# Altium PCB EMG_Sensors_Control.PcbDoc
Units mm, origin at the board's own origin, x right, y up, seen from the top; angles counter-clockwise.
Board outline 30 x 55.02 mm, 2 copper layers (Top Layer, Bottom Layer), stack 1.57 mm thick; 63 components, 52 nets, 270 pads, 73 vias.
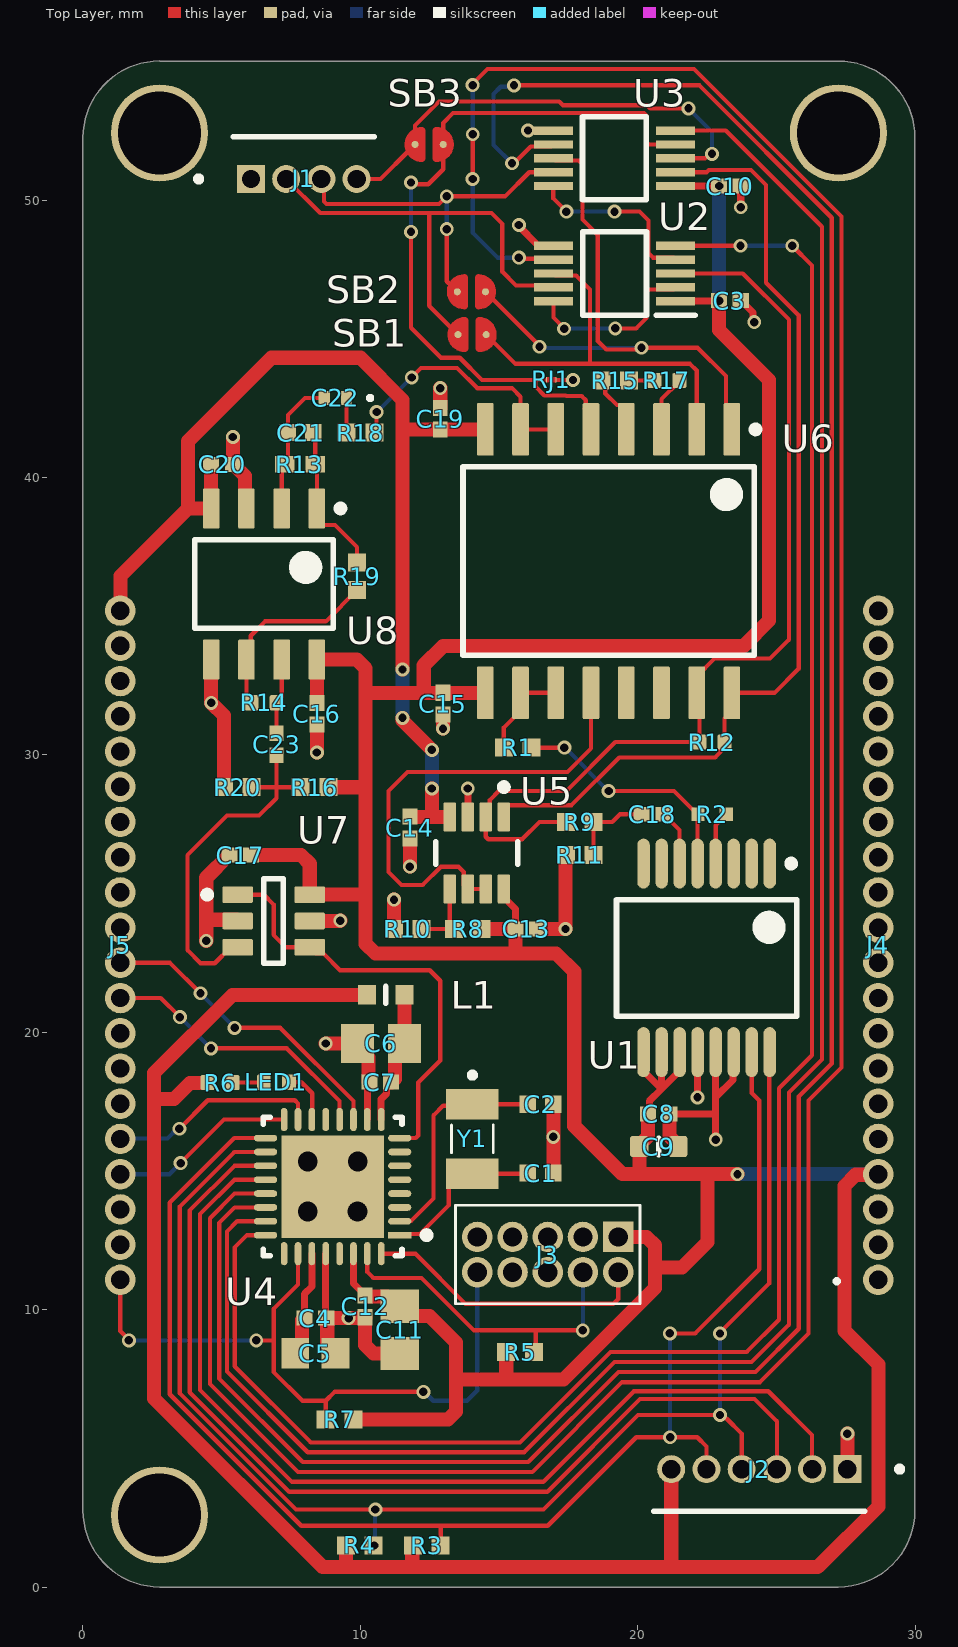
[diagram p0: Top Layer view]
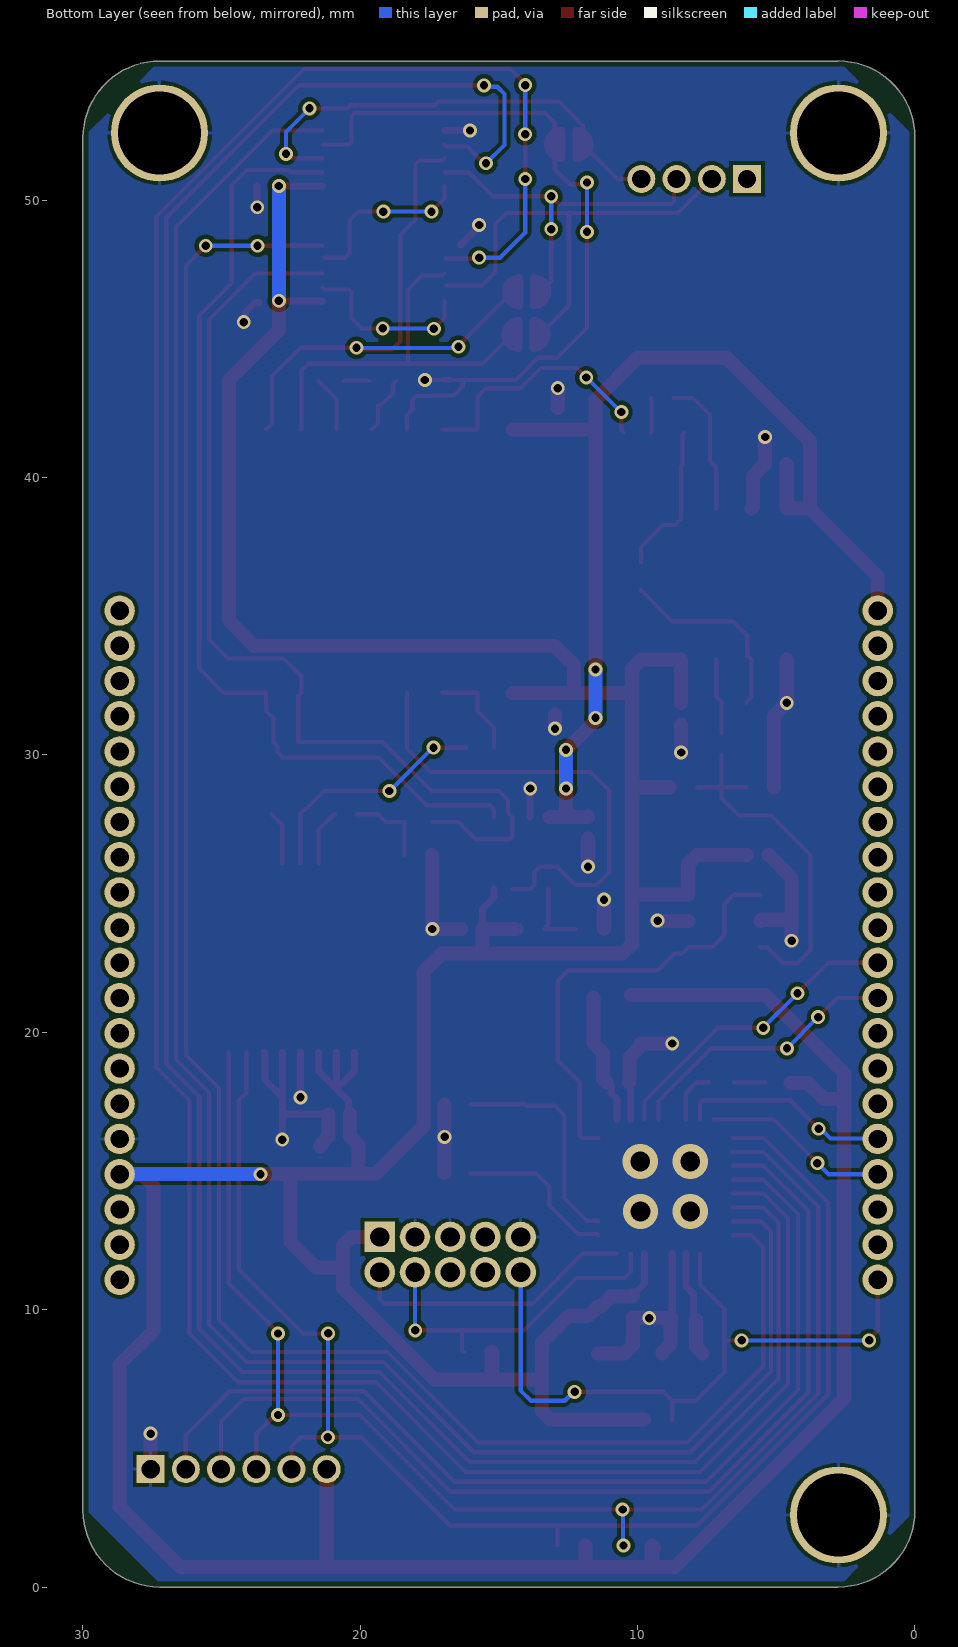
[diagram p1: Bottom Layer view, seen from below]
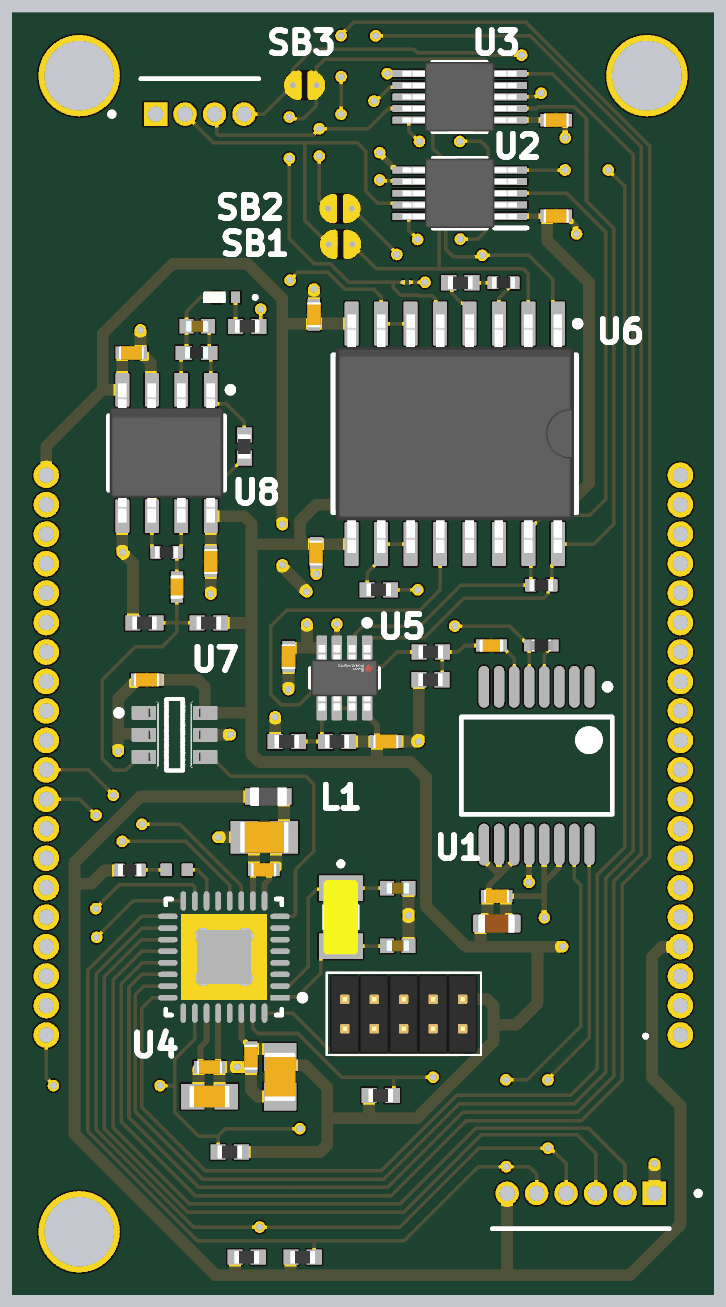
[diagram p2: 3D render of the assembled board from above, using the file's embedded part models]

## Layer stack, top to bottom
Top Solder: solder mask 0.01, Solder Resist, Dk 3.8
Top Layer: signal copper 0.035
Dielectric: core 1.5, FR-4, Dk 4.5
Bottom Layer: signal copper 0.035
Bottom Solder: solder mask 0.01, Solder Resist, Dk 3.8

## Board outline
0,2.762 ccw(c2.762,2.762) 2.762,0 27.235,0 ccw(c27.235,2.762) 29.997,2.762 29.997,52.252 ccw(c27.235,52.252) 27.235,55.015 2.762,55.017 2.762,55.02 ccw(c2.762,52.258) 0,52.258

## Design rules (kind name [scope] priority, off if disabled: settings)
BoardOutlineClearance [All] p1: gap=0.2 ignorepadtopadclearanceinfootprint=FALSE
Clearance [All] p1: gap=0.127 ignorepadtopadclearanceinfootprint=FALSE except(0.2: Arc-SMDPad Arc-THPad Track-SMDPad Track-THPad; 0.25: SMDPad-Hole THPad-Hole Via-Hole Fill-Hole Poly-Hole Region-Hole Text-Hole; 0.254: Arc-Via Track-Via; 0.33: Arc-Hole Track-Hole)
ComponentClearance [All] p1: gap=0.127 collisioncheckmode=3 verticalgap=0.127 showdistances=TRUE
DiffPairsRouting [All] p1: maxlimit=0.254 minlimit=0.127 mostfreqgap=0.127 toplayer_minwidth=0.127 toplayer_maxwidth=25.4 toplayer_prefwidth=0.127 bottomlayer_minwidth=0.127 bottomlayer_maxwidth=25.4 bottomlayer_prefwidth=0.127 maxuncoupledlength=12.7
Height [All] p1: minheight=0 maxheight=1816.048 prefheight=12.7
HoleSize [All] p1: absolutevalues=TRUE maxlimit=6.3 minlimit=0.3 maxpercent=80.000 minpercent=20.000
HoleToHoleClearance [All] p1: gap=0.25 allowstackedmicrovias=FALSE
MinimumAnnularRing [All] p1: minimumring=0.076
MinimumSolderMaskSliver [All] p1: minsoldermaskwidth=0
PlaneClearance [All] p1: clearance=0.127
PlaneConnect PlaneConnectPowerPads [InPadClass('PowerPads')] p1: planeconnectstyle=Direct reliefexpansion=0.508 reliefentries=4 reliefconductorwidth=0.254 reliefairgap=0.254
PlaneConnect [All] p2: pad.planeconnectstyle=Relief pad.reliefexpansion=0.3 pad.reliefentries=4 pad.reliefconductorwidth=0.127 pad.reliefairgap=0.127 via.planeconnectstyle=Direct via.reliefexpansion=0.3 via.reliefentries=4 via.reliefconductorwidth=0.127 via.reliefairgap=0.127
PolygonConnect PolygonConnectPowerPads [All vs (InPadClass('PowerPads'))] p1: connectstyle=Direct reliefconductorwidth=0.254 reliefentries=4 polygonreliefangle="90 Angle" airgapwidth=0.254
PolygonConnect [All] p2: thpad.connectstyle=Relief thpad.reliefconductorwidth=0.127 thpad.reliefentries=4 thpad.polygonreliefangle="90 Angle" thpad.airgapwidth=0.127 smdpad.connectstyle=Relief smdpad.reliefconductorwidth=0.127 smdpad.reliefentries=4 smdpad.polygonreliefangle="90 Angle" smdpad.airgapwidth=0.127 via.connectstyle=Direct via.reliefconductorwidth=0.127 via.reliefentries=4 via.polygonreliefangle="90 Angle" via.airgapwidth=0.127
RoutingVias [All] p1: holewidth=0.3 width=0.5 viastyle="Through Hole" minholewidth=0.3 minwidth=0.5 maxholewidth=1.5 maxwidth=6.6
SilkToSilkClearance [All] p1: silktosilkclearance=0
SilkToSolderMaskClearance [IsPad] p1: minsilkscreentomaskgap=0.127 clearancetoexposedcopper=TRUE
SolderMaskExpansion [All] p1: expansion=0.075 istentingtop=FALSE
Width [All] p1: maxlimit=0.508 minlimit=0.152 preferedwidth=0.254 minimp=50.000000 maximp=50.000000 favimp=50.000000
20 further rules are at their usual default settings.

## Components (designator, comment, footprint, x,y, rotation, side; value= is the part's Value field where it differs from the comment)
C1 "15 pF" CAPC1005X55N 16.497,14.925 r180 top
C2 "15 pF" CAPC1005X55N 16.497,17.404 r180 top
C3 "Capacitor 0.1 uF +/- 5% 16 V 0402" CAPC1005X56X25LL10T15 23.325,46.378 r0 top value=0.1uF
C4 "Capacitor 0.1 uF +/- 5% 16 V 0402" CAPC1005X56X25LL10T15 8.382,9.693 r180 top value=100nF
C5 "Capacitor 1uF +/- 10% 16V 0603" CAPC1608X90X35ML15T15 8.379,8.421 r0 top value=1µF
C6 "Capacitor 10 uF +/- 10% 16 V 0805" CAPC2013X135X45NL10T25 10.746,19.597 r0 top value=10µF
C7 "Capacitor 0.1 uF +/- 5% 16 V 0402" CAPC1005X56X25LL10T15 10.72,18.2 r0 top value=100nF
C8 "Capacitor 0.1 uF +/- 5% 16 V 0402" CAPC1005X56X25LL10T15 20.758,17.055 r0 top value=0.1uF
C9 "Capacitor 10µF +/-20% 10V 0603" CAPC0603(1608)100_L 20.758,15.88 r0 top value=10µF
C10 "Capacitor 0.1 uF +/- 5% 16 V 0402" CAPC1005X56X25LL10T15 23.325,50.51 r0 top value=0.1uF
C11 "Capacitor 10 uF +/- 10% 16 V 0805" CAPC2013X135X45NL10T25 11.419,9.271 r90 top value=10µF
C12 "Capacitor 0.1 uF +/- 5% 16 V 0402" CAPC1005X56X25LL10T15 10.17,10.117 r90 top value=100nF
C13 "Capacitor 0.1 uF +/- 5% 16 V 0402" CAPC1005X56X25LL10T15 15.982,23.726 r180 top value=0.1uF
C14 "Capacitor 0.1 uF +/- 5% 16 V 0402" CAPC1005X56X25LL10T15 11.787,27.384 r270 top value=0.1uF
C15 "Capacitor 0.1 uF +/- 5% 16 V 0402" CAPC1005X56X25LL10T15 12.979,31.852 r90 top value=0.1uF
C16 "Capacitor 0.1 uF +/- 5% 16 V 0402" CAPC1005X56X25LL10T15 8.433,31.488 r90 top value=0.1uF
C17 "Capacitor 0.1 uF +/- 5% 16 V 0402" CAPC1005X56X25LL10T15 5.672,26.387 r0 top value=0.1uF
C18 "Capacitor 1 uF +/- 10% 6.3 V 0402" CAPC1005X55X25LL05T10 20.528,27.864 r180 top value=1µF
C19 "Capacitor 0.1 uF +/- 5% 16 V 0402" CAPC1005X56X25LL10T15 12.881,42.119 r90 top value=0.1uF
C20 "Capacitor 0.1 uF +/- 5% 16 V 0402" CAPC1005X56X25LL10T15 5.013,40.48 r0 top value=0.1uF
C21 "22 nF" CAPC1005X55N 7.849,41.623 r0 top
C22 "3.3µF" C1005_Commercial 9.1,42.87 r180 top
C23 "Capacitor 1 uF +/- 10% 6.3 V 0402" CAPC1005X55X25LL05T10 6.978,30.387 r270 top value=1µF
J1 "TMS-104-02-L-S-RA" SAMTEC_TMS-104-02-L-S-RA 7.961,50.767 r0 top
J2 "TMS-106-02-G-S-RA" SAMTEC_TMS-106-02-G-S-RA 24.384,4.25 r180 top
J3 "M50-3500542" M503500542 19.297,12.62 r180 top
J4 "TMS-120-02-G-S" TMS-120-YY-XX-S 28.677,11.074 r90 top locked
J5 "TMS-120-02-G-S" TMS-120-YY-XX-S 1.346,11.074 r90 top locked
L1 "BLM18PG471SN1B" BLM18AG102BH1D 10.919,21.351 r0 top
LED1 "QBLP595-IG" QTB-QBLP595_V 6.971,18.2 r180 top
R1 "Resistor 10k +/-1% 0402 63 mW" RESC1005X40X25ML05T05 15.674,30.263 r0 top value=10k
R2 "ERJ-H2RD1502X" H2C/H2R 22.682,27.864 r0 top
R3 "Resistor 4k7 +/-1% 0402 100 mW" RESC1005X40X25ML05T05 12.395,1.499 r180 top value=4.7k
R4 "Resistor 4k7 +/-1% 0402 100 mW" RESC1005X40X25ML05T05 9.982,1.499 r180 top value=4.7k
R5 "Resistor 1k +/-1% 0402 63 mW" RESC1005X40X25ML05T05 15.759,8.471 r0 top value=1k
R6 "Resistor 330R +/-5 % 0402 63 mW" RESC0402(1005)_L 4.943,18.187 r0 top value=330
R7 "Resistor 10k +/-1% 0402 63 mW" RESC1005X40X25ML05T05 9.252,6.033 r180 top value=10k
R8 "Resistor 100k +/-1% 0402 63 mW" RESC1005X40X25ML05T05 13.874,23.726 r180 top value=100k
R9 "Resistor 100k +/-1% 0402 63 mW" RESC1005X40X25ML05T05 17.915,27.584 r180 top value=100k
R10 "Resistor 100k +/-1% 0402 63 mW" RESC1005X40X25ML05T05 11.711,23.726 r180 top value=100k
R11 "Resistor 1k +/-1% 0402 63 mW" RESC1005X40X25ML05T05 17.907,26.387 r180 top value=1k
R12 "Resistor 1M +/-1 % 0402 63 mW" RESC0402(1005)_L 22.682,30.463 r0 top value=1M
R13 "30k" RESC1005X40N 7.823,40.48 r0 top
R14 "Resistor 47K5 +/-1 % 0402 63 mW" RESC0402(1005)_L 6.528,31.878 r0 top value=47.5k
R15 "Resistor 4k7 +/-1% 0402 100 mW" RESC1005X40X25ML05T05 19.191,43.499 r0 top value=4.7k
R16 "Resistor 10k +/-1% 0402 63 mW" RESC1005X40X25ML05T05 8.349,28.836 r180 top value=10k
R17 "100R2F" RESC0402(1005)_L 21.053,43.499 r0 top value=100
R18 "Resistor 10k +/-1% 0402 63 mW" RESC1005X40X25ML05T05 10.008,41.623 r180 top value=10k
R19 "Resistor 10k +/-1% 0402 63 mW" RESC1005X40X25ML05T05 9.881,36.441 r270 top value=10k
R20 "Resistor 10k +/-1% 0402 63 mW" RESC1005X40X25ML05T05 5.578,28.836 r180 top value=10k
RJ1 "Net Tie 10x8mil" "New footprint 1" 16.884,43.521 r0 top net-tie
SB1 "SolderBridge" SolderBridge-Footprint-1#1 14.029,45.154 r0 top
SB2 "SolderBridge" SolderBridge-Footprint-1#1 14.003,46.698 r0 top
SB3 "SolderBridge" SolderBridge-Footprint-1#2 12.481,52.01 r0 top
U1 "AD5933YRSZ" ADI-RS-16_L 22.485,22.685 r270 top
U2 "TS5A22364QDGSRQ1" SOP50P490X110-10N 19.167,47.358 r180 top
U3 "TS5A22364QDGSRQ1" SOP50P490X110-10N 19.159,51.51 r180 top
U4 "ATSAML21E18B-MUT" FP-PG-IPC_B 9.002,14.436 r180 top
U5 "OPA2992IDDFR" FP-DDF0008A-MFG 14.199,26.467 r270 top
U6 "INA2128U" DW0016A_N 18.952,36.988 r270 top
U7 "OPA992SIDBVR" FP-DBV0006A-MFG 6.875,24.013 r0 top
U8 "OPA2130UA" D0008A_N 6.528,36.162 r270 top
Y1 "OSC" ABS0716632768KHZT 14.04,16.154 r270 top

## Footprints (in the part's own frame and the unit in brackets; to place one, negate y for a bottom-side part, rotate by r counter-clockwise, add the part's x,y. Pads: shape width x height; smd on the part's side, far side on the other; paste and mask are expansions set on the pad)
ABS0716632768KHZT [mm]
  rect 1.1x1.9 smd: 1(-1.25,0) 2(1.25,0)
  silkscreen extent -2.4,-0.75 0.5,0.75, body extent -1.6,-0.75 1.6,0.75, height 0.9
ADI-RS-16_L [mm] "SOP, 16-Leads, Body 6.2x5.3mm, Pitch 0.65mm, IPC High Density"
  oval 1.8x0.45 smd: 1(-3.4,2.275) 2(-3.4,1.625) 3(-3.4,0.975) 4(-3.4,0.325) 5(-3.4,-0.325) 6(-3.4,-0.975) 7(-3.4,-1.625) 8(-3.4,-2.275) 9(3.4,-2.275) 10(3.4,-1.625) 11(3.4,-0.975) 12(3.4,-0.325) 13(3.4,0.325) 14(3.4,0.975) 15(3.4,1.625) 16(3.4,2.275)
  silkscreen extent -3.52,-3.25 2.1,3.25, body extent -2.8,-3.25 2.8,3.25, height 2
BLM18AG102BH1D [mm]
  rect 0.65x0.7 smd: 1(-0.675,0) 2(0.675,0)
  silkscreen extent 0,-0.3 0,0.3, body extent -0.8,-0.4 0.8,0.4, height 0.8
C1005_Commercial [mm]
  rect 0.4x0.5 smd: 1(-0.4,0) 2(0.4,0)
  silkscreen extent -1.3,-0.05 -1.2,0.05, body extent 0,-0.25 1,0.25, height 0.25
CAPC0603(1608)100_L [mm] "Chip Capacitor, Body 1.6x0.8mm, Height 1.0mm, IPC High Density"
  rrect25% 0.66x0.76 smd: 1(-0.7,0) 2(0.7,0)
  silkscreen extent 0,-0.3 0,0.3, body extent -0.8,-0.4 0.8,0.4, height 0.95
CAPC1005X55N [mm]
  rect 0.6x0.62 smd: 1(-0.46,0) 2(0.46,0)
  body extent -0.5,-0.25 0.5,0.25, height 0.55
CAPC1005X55X25LL05T10 [mm] "Chip Capacitor, 2-Leads, Body 1.05x0.55mm, IPC High Density"
  rect 0.56x0.52 smd: 1(-0.39,0) 2(0.39,0)
  body extent -0.53,-0.28 0.53,0.28, height 0.55
CAPC1005X56X25LL10T15 [mm] "Chip Capacitor, 2-Leads, Body 1.10x0.60mm, IPC High Density"
  rect 0.58x0.54 smd: 1(-0.39,0) 2(0.39,0)
  body extent -0.55,-0.3 0.55,0.3, height 0.56
CAPC1608X90X35ML15T15 [mm] "Chip Capacitor, 2-Leads, Body 1.75x0.95mm, IPC Low Density"
  rect 1x1.1 smd: 1(-0.725,0) 2(0.725,0)
  body extent -0.87,-0.48 0.87,0.48, height 0.9
CAPC2013X135X45NL10T25 [mm] "Chip Capacitor, 2-Leads, Body 2.10x1.35mm, IPC Medium Density"
  rect 1.2x1.4 smd: 1(-0.85,0) 2(0.85,0)
  body extent -1.05,-0.67 1.05,0.67, height 1.35
D0008A_N [mm] "SOIC, 8-Leads, Body 5x4mm, Pitch 1.27mm, IPC Medium Density"
  rrect17% 1.45x0.6 smd: 1(-2.725,1.905) 2(-2.725,0.635) 3(-2.725,-0.635) 4(-2.725,-1.905) 5(2.725,-1.905) 6(2.725,-0.635) 7(2.725,0.635) 8(2.725,1.905)
  silkscreen extent -2.85,-2.5 1.6,2.88, body extent -3,-2.45 3,2.45, height 1.63
DW0016A_N [mm] "SOIC, 16-Leads, Body 10.5x7.6mm, Pitch 1.27mm, IPC Medium Density"
  rrect17% 1.9x0.6 smd: 1(-4.75,4.445) 2(-4.75,3.175) 3(-4.75,1.905) 4(-4.75,0.635) 5(-4.75,-0.635) 6(-4.75,-1.905) 7(-4.75,-3.175) 8(-4.75,-4.445) 9(4.75,-4.445) 10(4.75,-3.175) 11(4.75,-1.905) 12(4.75,-0.635) 13(4.75,0.635) 14(4.75,1.905) 15(4.75,3.175) 16(4.75,4.445)
  silkscreen extent -4.87,-5.25 3.4,5.42, body extent -5.14,-5.13 5.14,5.13, height 2.5
FP-DBV0006A-MFG [mm]
  rrect17% 1.1x0.6 smd paste+0 mask+0: 1(-1.3,0.95) 2(-1.3,0) 3(-1.3,-0.95) 4(1.3,-0.95) 5(1.3,0) 6(1.3,0.95)
  silkscreen extent -2.52,-1.53 0.35,1.53, body extent -1.95,-1.78 1.95,1.78, height 0.25
FP-DDF0008A-MFG [mm]
  rrect22% 1.05x0.45 smd paste+0 mask+0: 1(-1.3,0.975) 2(-1.3,0.325) 3(-1.3,-0.325) 4(-1.3,-0.975) 5(1.3,-0.975) 6(1.3,-0.325) 7(1.3,0.325) 8(1.3,0.975)
  silkscreen extent -2.5,-1.48 0.4,1.48, body extent -1.92,-1.73 1.92,1.73, height 0.25
FP-PG-IPC_B [mm]
  rect 0.835x0.239 smd paste+0 mask+0: 1(-2.418,1.75)
  rrect100% 0.835x0.239 smd paste+0 mask+0: 2(-2.418,1.25) 3(-2.418,0.75) 4(-2.418,0.25) 5(-2.418,-0.25) 6(-2.418,-0.75) 7(-2.418,-1.25) 8(-2.418,-1.75) 17(2.418,-1.75) 18(2.418,-1.25) 19(2.418,-0.75) 20(2.418,-0.25) 21(2.418,0.25) 22(2.418,0.75) 23(2.418,1.25) 24(2.418,1.75)
  rrect100% 0.239x0.835 smd paste+0 mask+0: 9(-1.75,-2.418) 10(-1.25,-2.418) 11(-0.75,-2.418) 12(-0.25,-2.418) 13(0.25,-2.418) 14(0.75,-2.418) 15(1.25,-2.418) 16(1.75,-2.418) 25(1.75,2.418) 26(1.25,2.418) 27(0.75,2.418) 28(0.25,2.418) 29(-0.25,2.418) 30(-0.75,2.418) 31(-1.25,2.418) 32(-1.75,2.418)
  rect 3.7x3.7 smd paste-1000 mask+0: 33(0,0)
  silkscreen extent -3.51,-2.5 2.5,2.5
H2C/H2R [mm]
  rect 0.475x0.5 smd: 1(-0.512,0) 2(0.512,0)
  body extent -0.5,-0.25 0.5,0.25, height 0.4
M503500542 [mm]
  rect 1.1x1.1 hole 0.7: 1(0,0)
  round 1.1 hole 0.7: 2(0,1.27) 3(1.27,0) 4(1.27,1.27) 5(2.54,0) 6(2.54,1.27) 7(3.81,0) 8(3.81,1.27) 9(5.08,0) 10(5.08,1.27)
  silkscreen extent -0.78,-1.14 5.86,2.41, body extent -0.63,-1.06 5.72,2.34, height 3.95
"New footprint 1" [mil]
  rect 1x8 smd: 1(-6.89,0) 2(6.89,0)
  Top Layer region: -6.89,-4 6.89,-4 6.89,4 -6.89,4
QTB-QBLP595_V [mm] "SMD, 2-Leads, Body 1x0.5mm"
  rrect25% 0.5x0.55 smd: 1(-0.455,0) 2(0.455,0)
  body extent -0.5,-0.25 0.5,0.25, height 0.5
RESC0402(1005)_L [mm] "Chip Resistor, Body 1.0x0.5mm, IPC High Density"
  rrect25% 0.5x0.55 smd: 1(-0.45,0) 2(0.45,0)
  body extent -0.5,-0.25 0.5,0.25, height 0.3
RESC1005X40N [mm]
  rect 0.7x0.6 smd: 1(-0.55,0) 2(0.55,0)
  body extent -0.5,-0.25 0.5,0.25, height 0.4
RESC1005X40X25ML05T05 [mm] "Chip Resistor, 2-Leads, Body 1.05x0.55mm, IPC Low Density"
  rect 0.65x0.65 smd: 1(-0.5,0) 2(0.5,0)
  body extent -0.53,-0.28 0.53,0.28, height 0.4
SAMTEC_TMS-104-02-L-S-RA [mm]
  rect 1.01x1.01 hole 0.66: 01(-1.905,0)
  round 1.01 hole 0.66: 02(-0.635,0) 03(0.635,0) 04(1.905,0)
  silkscreen extent -3.89,-0.1 2.54,1.52
SAMTEC_TMS-106-02-G-S-RA [mm]
  rect 1.01x1.01 hole 0.66: 01(-3.175,0)
  round 1.01 hole 0.66: 02(-1.905,0) 03(-0.635,0) 04(0.635,0) 05(1.905,0) 06(3.175,0)
  silkscreen extent -5.16,-0.1 3.81,1.52
SolderBridge-Footprint-1#1 [mil]
  round 10 smd mask+0: 1(20,0) 2(-20,0)
  Top Layer region: 10,20 25,15 30,10 30,5 30,-10 20,-20 10,-20 10,0
  Top Layer region: -25,15.83 -10,15.83 -10,7.5 -10,-20 -11.67,-21.67 -25,-15 -30,2.5
  Top Layer lines w10: -28.23,8.23 ccw(c-10,0) -10,-20 -10,0 -10,20 ccw(c-10,0) -28.23,8.23 ; 10,-20 ccw(c10,0) 28.23,-8.23 ccw(c10,0) 10,20 10,0 10,-20
SolderBridge-Footprint-1#2 [mil]
  round 10 smd mask+0: 1(20,0) 2(-20,0)
  Top Layer region: -25,15.83 -10,15.83 -10,7.5 -10,-20 -11.67,-21.67 -25,-15 -30,2.5
  Top Layer region: 10,20 25,15 30,10 30,5 30,-10 20,-20 10,-20 10,0
  Top Layer lines w10: -28.23,-8.23 ccw(c-10,0) -10,-20 -10,0 -10,20 ccw(c-10,0) -20,17.32 ccw(c-10,0) -28.23,-8.23 ; 10,-20 ccw(c10,0) 20,-17.32 ccw(c10,0) 20,17.32 ccw(c10,0) 10,20 10,0 10,-20
SOP50P490X110-10N [mm]
  rect 1.4x0.3 smd: 1(-2.2,1) 2(-2.2,0.5) 3(-2.2,0) 4(-2.2,-0.5) 5(-2.2,-1) 6(2.2,-1) 7(2.2,-0.5) 8(2.2,0) 9(2.2,0.5) 10(2.2,1)
  silkscreen extent -2.9,-1.5 1.15,1.5, body extent -2.46,-1.5 2.46,1.5, height 1.1
TMS-120-YY-XX-S [mm]
  round 1.1 hole 0.66: 1(0,0) 2(1.27,0) 3(2.54,0) 4(3.81,0) 5(5.08,0) 6(6.35,0) 7(7.62,0) 8(8.89,0) 9(10.16,0) 10(11.43,0) 11(12.7,0) 12(13.97,0) 13(15.24,0) 14(16.51,0) 15(17.78,0) 16(19.05,0) 17(20.32,0) 18(21.59,0) 19(22.86,0) 20(24.13,0)
  silkscreen extent -0.1,1.45 0,1.55

## Part data
C1 C2: library part GCM1555C1H150JA16D, "Capacitor 15PF 50V 5% 0402", Manufacturer_Name="Murata Electronics", Mouser Part Number=81-GCM1555C1H150JA6D, Arrow Part Number=GCM1555C1H150JA16D, Arrow Price/Stock=https://www.arrow.com/en/products/gcm1555c1h150ja16d/murata-manufacturing?region=nac, Datasheet Link=https://psearch.en.murata.com/capacitor/product/GCM1555C1H150JA16%23.html, Height=0.55mm, Manufacturer_Part_Number=GCM1555C1H150JA16D, Mouser Price/Stock=https://www.mouser.co.uk/ProductDetail/Murata-Electronics/GCM1555C1H150JA16D?qs=jDWTHf1mkXYg4D1%252B30O6Eg%3D%3D
C3 C4 C7 C8 C10 C12 C13 C14 C15 C16 C17 C19 C20: library part CMP-001-00001-6, "Chip Capacitor, 0.1 uF, +/- 5%, 16 V, 0402 (1005 Metric)", Capacitor Type=Ceramic, Case/Package=0402, Max Operating Temperature=125°C, Min Operating Temperature=-55°C, Tolerance=5%, Voltage Rating=16V, Mounting Technology=SM, Pins=2, RoHS Compliant=True
C5: library part CMP-001-00004-6, "Chip Capacitor, 1 uF, +/- 10%, 16 V, 0603 (1608 Metric)", Capacitor Type=Ceramic, Case/Package=0603, Max Operating Temperature=125°C, Min Operating Temperature=-55°C, Tolerance=10%, Voltage Rating=16V, Mounting Technology=SM, Pins=2, RoHS Compliant=True
C6 C11: library part CMP-001-00015-6, "Chip Capacitor, 10 uF, +/- 10%, 16 V, 0805 (2012 Metric)", Capacitor Type=Ceramic, Case/Package=0805, Max Operating Temperature=85°C, Min Operating Temperature=-55°C, Tolerance=10%, Voltage Rating=16V, Mounting Technology=SM, Pins=2, RoHS Compliant=True
C9: library part CMP-001-00075-4, "Chip Capacitor, 10µF +/-20%, 10V, 0603, Thickness 1 mm", Case/Package=0603, Max Operating Temperature=85°C, Min Operating Temperature=-55°C, Tolerance=10%, Voltage Rating=10V, Mounting Technology=SMT, Pins=2
C18 C23: library part CMP-001-00008-6, "Chip Capacitor, 1 uF, +/- 10%, 6.3 V, 0402 (1005 Metric)", Capacitor Type=Ceramic, Case/Package=0402, Max Operating Temperature=85°C, Min Operating Temperature=-55°C, Tolerance=10%, Voltage Rating=6.3V, Mounting Technology=SM, Pins=2, RoHS Compliant=True
C21: library part GRM155R70J222KA01D, "Capacitor 22nF", Manufacturer_Name="Murata Electronics", Mouser Part Number=81-GRM155R70J222KA1D, Arrow Part Number=GRM155R70J222KA01D, Arrow Price/Stock=https://www.arrow.com/en/products/grm155r70j222ka01d/murata-manufacturing, Datasheet Link=https://datasheet.datasheetarchive.com/originals/distributors/Datasheets_SAMA/ec4f1577dddcc7a13ddad897a28002d3.pdf, Height=0.55mm, Manufacturer_Part_Number=GRM155R70J222KA01D, Mouser Price/Stock=https://www.mouser.co.uk/ProductDetail/Murata-Electronics/GRM155R70J222KA01D?qs=y02iAgv9n62BiqXMhBx0hg%3D%3D
C22: library part C1005X5R0J335K050BC, "Capacitor 3.3uF", Manufacturer_Name=TDK, Mouser Part Number=810-C1005X5R0J335K, Arrow Part Number=C1005X5R0J335K050BC, Arrow Price/Stock=https://www.arrow.com/en/products/c1005x5r0j335k050bc/tdk, Datasheet Link=https://product.tdk.com/system/files/dam/doc/product/capacitor/ceramic/mlcc/catalog/mlcc_commercial_general_en.pdf, Height=0.55mm, Manufacturer_Part_Number=C1005X5R0J335K050BC, Mouser Price/Stock=https://www.mouser.co.uk/ProductDetail/TDK/C1005X5R0J335K050BC?qs=dfay7wIA1uECT7biEkI9Ng%3D%3D
J1 J2: Package=None, Availability=Unavailable, Price=None
  J1: MP=TMS-104-02-L-S-RA
  J2: MP=TMS-106-02-G-S-RA
J3: "Connector", Manufacturer_Name=Harwin, Mouser Part Number=855-M50-3500542, Datasheet Link=https://datasheet.datasheetarchive.com/originals/distributors/SFDatasheet-1/sf-00022684.pdf, Height=4.15mm, Manufacturer_Part_Number=M50-3500542, Mouser Price/Stock=https://www.mouser.co.uk/ProductDetail/Harwin/M50-3500542?qs=9fQaSFfsqsyXI0P9tFOVoQ%3D%3D
J4 J5: "Connector - male needed, place on top board", Manufacturer_Name=SAMTEC, Mouser Part Number=200-TMS12002GS, Datasheet Link=http://suddendocs.samtec.com/prints/tms-1xx-xx-xx-x-xx-xxx-mkt.pdf, Manufacturer_Part_Number=TMS-120-02-G-S, Mouser Price/Stock=https://www.mouser.co.uk/ProductDetail/Samtec/TMS-120-02-G-S?qs=0lQeLiL1qyZLykZTiH0Mag%3D%3D
L1: "Filter", Manufacturer_Name="Murata Electronics", Mouser Part Number=81-BLM18PG471SN1B, Datasheet Link=https://www.murata.com/en-us/products/productdetail?partno=BLM18PG471SN1%23, Height=0.95mm, Manufacturer_Part_Number=BLM18PG471SN1B, Mouser Price/Stock=https://www.mouser.com/Search/Refine.aspx?Keyword=81-BLM18PG471SN1B
LED1: library part CMP-007-00041-3, "Chip LED 0402, Green, 0.02 A, 3.1 to 3.7 V, -40 to 80 degC, 2-Pin SMD, RoHS, Tape and Reel", Case/Package=0402, Colour=Green, Mounting Technology=SMT, Pins=2, RoHS Compliant=Yes
R1 R7 R16 R18 R19 R20: library part CMP-009-00019-5, "Chip Resistor, 10 KOhm, +/- 1%, 63 mW, -55 to 155 degC, 0402 (1005 Metric)", Case/Package=0402, Max Operating Temperature=155°C, Min Operating Temperature=-55°C, Power=63mW, Tolerance=1%, Voltage Rating=50V, Mounting Technology=SM, Pins=2, RoHS Compliant=True
R2: "Resistor", Manufacturer_Name=Panasonic, Datasheet Link=http://industrial.panasonic.com/cdbs/www-data/pdf/RDQ0000/ast-ind-151033.pdf, Manufacturer_Part_Number=ERJ-H2RD1502X
R3 R4 R15: library part CMP-009-00030-5, "Chip Resistor, 4.7 KOhm, +/- 1%, 0.1 W, -55 to 155 degC, 0402 (1005 Metric)", Case/Package=0402, Max Operating Temperature=155°C, Min Operating Temperature=-55°C, Power=100mW, Tolerance=1%, Voltage Rating=50V, Mounting Technology=SM, Pins=2, RoHS Compliant=True
R5 R11: library part CMP-009-00012-5, "Chip Resistor, 1 KOhm, +/- 1%, 63 mW, -55 to 155 degC, 0402 (1005 Metric)", Case/Package=0402, Max Operating Temperature=155°C, Min Operating Temperature=-55°C, Power=63mW, Tolerance=1%, Mounting Technology=SM, Pins=2, RoHS Compliant=True
R6: library part CMP-009-00132-3, "Chip Resistor, 330 Ohms, +/-5 %, 63 mW, -55 to 155 degC, 0402", Case/Package=0402, Max Operating Temperature=155°C, Min Operating Temperature=-55°C, Power=63mW, Tolerance=5%, Pins=2
R8 R9 R10: library part CMP-009-00021-5, "Chip Resistor, 100 KOhm, +/- 1%, 0.063 W, -55 to 155 degC, 0402 (1005 Metric)", Case/Package=0402, Max Operating Temperature=155°C, Min Operating Temperature=-55°C, Power=63mW, Tolerance=1%, Voltage Rating=50V, Mounting Technology=SM, Pins=2, RoHS Compliant=True
R12: library part CMP-009-00165-3, "Chip Resistor, 1 MOhms, +/-1 %, 63 mW, -55 to 155 degC, 0402", Case/Package=0402, Power=63mW, Tolerance=1%, Pins=2
R13: library part SFR01MZPJ303, "Resistor 30k 0402", Manufacturer_Name="ROHM Semiconductor", Datasheet Link=https://www.mouser.co.uk/datasheet/2/348/sfr_e-3009639.pdf, Height=0.4mm, Manufacturer_Part_Number=SFR01MZPJ303
R14: library part CMP-009-00137-3, "Chip Resistor, 47,5 kOhms, +/-1 %, 63 mW, -55 to 155 degC, 0402", Case/Package=0402, Max Operating Temperature=155°C, Min Operating Temperature=-55°C, Power=63mW, Tolerance=1%, Pins=2
R17: library part CMP-009-00065-2, "100R 0.063W 1% 0402 (1005 Metric)  SMD", Case/Package=0402, Power=63mW, Tolerance=1%, Mounting Technology=SMT, Pins=2
RJ1: library part CMP-009-00116-2, Max Operating Temperature=155°C, Min Operating Temperature=-55°C, Pins=2
SB1 SB2 SB3: library part CMP-00000-1, "Simple open solder bridge"
U1: library part CMP-0293-00046-1, "1 MSPS, 12-Bit Impedance Converter, Network Analyzer, Serial, RS-16, 77 Tube, Pb-Free", Code_JEDEC=MO-150-AC, ComponentLink1Description="Manufacturer URL", ComponentLink1URL=www.analog.com, ComponentLink2Description=Datasheet, ComponentLink2URL=http://www.analog.com/static/imported-files/data_sheets/AD5933.pdf, ComponentLink3Description="Package Specification", ComponentLink3URL=http://www.analog.com/static/imported-files/packages/31572257652246RS_16.pdf, DatasheetVersion="Rev. D", I Supply total (max)=15mA, I/O Interface=Serial, Master fclk=16.776MHz, PackageDescription="16-Lead Shrink Small Outline Package [SSOP]", PackageReference=RS-16, PackageVersion=3/17/2005, Resolution (Bits)=12bit, Tuning Word Width (bits)=27bit
U2 U3: "Integrated Circuit", Manufacturer_Name="Texas Instruments", Mouser Part Number=595-TS5A22364QDGSRQ1, Arrow Part Number=TS5A22364QDGSRQ1, Arrow Price/Stock=https://www.arrow.com/en/products/ts5a22364qdgsrq1/texas-instruments?region=nac, Datasheet Link=http://www.ti.com/lit/gpn/ts5a22364-q1, Height=1.1mm, Manufacturer_Part_Number=TS5A22364QDGSRQ1, Mouser Price/Stock=https://www.mouser.co.uk/ProductDetail/Texas-Instruments/TS5A22364QDGSRQ1?qs=1CfNGUMoiQ80LHbRl6nZYw%3D%3D
U4: library part CMP-06276-000180-1, "IC MCU 32BIT 256KB FLASH 32QFN", Case/Package=QFN, Frequency=48MHz, Max Operating Temperature=85°C, Min Operating Temperature=-40°C, Core Architecture=ARM, Interface=I2C, Memory Size=256KB, Memory Type=FLASH, Number of I/Os=25, Oscillator Type=Internal, Packaging="Cut Tape", Peripherals=POR, RoHS Compliant=Yes
U5: library part CMP-04895-000462-1, "IC OPAMP GP 2 CIRCUIT TSOT23-8"
U6: library part CMP-0985-00122-2, "Dual, Low Power Instrumentation Amplifier, -40 to 85 degC, 16-pin SOIC (DW16), Green (RoHS & no Sb/Br)", Manufacturer="Texas Instruments", CMRR(Min)(dB)=120, Code_JEDEC=MS-013, ComponentLink1Description="Manufacturer URL", ComponentLink1URL=http://www.ti.com/, ComponentLink2Description=Datasheet, ComponentLink2URL=http://www.ti.com/general/docs/lit/getliterature.tsp?genericPartNumber=INA2128&fileType=pdf, ComponentLink3Description="Package Specification", ComponentLink3URL=http://www.ti.com/litv/pdf/msoi003g, DatasheetVersion=SBOS035A, Dual Supply=TRUE, Eco-Plan="Green (RoHS & no Sb/Br)", Gain(V/V)="1 to 10000", Input Offset (+/-)(Max)(uV)=50, Mounting Technology="Surface Mount", Number of Channels=2, PackageDescription="16-Pin Plastic Small Outline, Body 10.30 x 7.50 mm, Pitch 1.27 mm", PackageReference=DW0016A, PackageVersion="4040000-2/G, 01/2011", PartNumber=INA2128U, Slew Rate(Typ)(V/us)=4, SubFamily="Difference Amplifier", Vs(Max)(V)=36, Vs(Min)(V)=4.5
U7: library part CMP-04895-000474-1, "IC OPAMP"
U8: library part CMP-0271-00118-3, "Low Power, Precision FET-Input Operational Amplifier, 4.5 to 36 V, -40 to 85 degC, 8-pin SOIC (D8), Green (RoHS & no Sb/Br)", Manufacturer="Texas Instruments", Rating=Catalog, Total Supply Voltage(Max)(+5V is 5, +/-5V is 10)=36, Total Supply Voltage(Min)(+5V is 5, +/-5V is 10)=4.5, CMRR(Min)(dB)=90, Code_JEDEC=MS-012, ComponentLink1Description="Manufacturer URL", ComponentLink1URL=http://www.ti.com/, ComponentLink2Description=Datasheet, ComponentLink2URL=http://www.ti.com/lit/ds/symlink/opa2130.pdf, ComponentLink3Description="Package Specification", ComponentLink3URL=http://www.ti.com/litv/pdf/msoi002j, DatasheetVersion=SBOS053A, Eco-Plan="Green (RoHS & no Sb/Br)", GBW(Typ)(MHz)=1, IIB(Max)(pA)=20, Iq per channel(Max)(mA)=0.65, Mounting Technology="Surface Mount", Number of Channels=2, Offset Drift(Typ)(uV/C)=2, PackageDescription="8-Pin Plastic Small Outline, Body 4.9 x 3.9 mm, Pitch 1.27 mm", PackageReference=D0008A, PackageVersion="4040047-3/M, 06/2011", Packing=TUBE, PartNumber=OPA2130UA, Slew Rate(Typ)(V/us)=2, Sub Family="High Supply Voltage Amplifier (>=30V), Precision Amplifier", Vio (25C)(Max)(mV)=1
Y1: library part ABS07-32.768KHZ-T, "Crystal or Oscillator ABS07-32.768KHZ-T 12.5pF", Manufacturer_Name=ABRACON, Mouser Part Number=815-ABS07-32.768KHZT, Arrow Part Number=ABS07-32.768KHZ-T, Arrow Price/Stock=https://www.arrow.com/en/products/abs07-32.768khz-t/abracon?region=europe, Datasheet Link=https://abracon.com/Resonators/ABS07.pdf, Height=0.9mm, Manufacturer_Part_Number=ABS07-32.768KHZ-T, Mouser Price/Stock=https://www.mouser.co.uk/ProductDetail/ABRACON/ABS07-32.768KHZ-T?qs=3SpAxaLJ01g8GJWeO3sA3Q%3D%3D

## Free pads (board coordinates)
  round 3.5 hole 3: 2(2.762,2.594) 2(2.762,52.426) 2(27.235,52.426)

## Via types
v1: diameter 0.5, hole 0.3, Top Layer to Bottom Layer, 69 vias
v2: diameter 1.27, hole 0.711, Top Layer to Bottom Layer, 4 vias

## Nets (pads, with @x,y where several pads share a name; then routed paths per layer and width w, separated by ;. In a path a pad name is that pad's centre, name@x,y a point inside that pad or via, vN(x,y) a via of type N, cw(c..) or ccw(c..) an arc to the next point about the centre after c; other vN are vias at no path point)
+3.3V: C3.1 C8.1 C9.1 C10.1 C11.2 C12.2 C13.2 C15.2 C16.2 C17.2 J2.06 J3.1 J4.4 L1.1 R3.2 R4.2 R5.1 R6.1 R7.1 R8.1 R16.1 U1.9 U1.10 U1.11 U2.1 U3.1 U4.30 U5.8 U6.9 U7.6 U8.8 | length 195.1
  Top Layer w0.254: U4.30 9.752,10.946 10.17,10.527 C12.2 ; U5.8 15.174,24.867 15.592,24.449 C13.2 ; U1.9 20.21,18.611 20.86,17.961 ; C8.1 20.419,17.106 20.419,17.519 20.86,17.961 ; U1.10 20.86,17.961 ; U3.1 v1(22.935,50.51) ; U2.1 21.376,46.368 22.925,46.368 v1(22.935,46.378) ; U1.11 21.51,18.611 20.86,17.961
  Top Layer w0.508: R6.1@4.489,18.166 3.855,18.166 3.283,17.594 2.565,17.594 ; C17.2 7.866,26.387 8.175,26.078 U7.6 10.193,24.963 ; C16.2 U8.8 9.87,33.437 10.193,33.113 10.193,32.213 ; R16.1 10.193,28.836 ; R4.2@9.411,1.428 R4.2 9.482,0.717 ; R7.1@9.777,6.033 13.154,6.033 13.452,6.331 13.452,7.488 ; C12.2 10.17,10.491 10.186,10.475 10.966,10.475 11.319,10.121 C11.2 11.765,9.775 12.492,9.775 13.452,8.815 13.452,7.488 ; L1.1 5.389,21.351 2.565,18.526 2.565,17.594 ; R3.2 11.872,1.476 11.872,0.717 ; R8.1 C13.2 15.6,23.718 15.6,22.84 ; U6.9 14.498,32.229 12.979,32.229 12.287,32.229 ; R5.1 15.259,7.496 15.267,7.488 ; J3.1 20.321,12.62 20.618,12.323 20.618,11.522 ; C8.1 20.368,16.24 20.058,15.93 C9.1 20.058,14.884 ; J2.06 21.209,0.743 21.182,0.717 ; v1(22.935,46.378) 22.935,45.32 24.74,43.516 24.74,34.85 23.824,33.934 12.989,33.934 12.287,33.232 12.287,32.229 ; v1(23.599,14.884) 22.431,14.884 ; J4.4 28.657,14.864 27.857,14.864 27.458,14.465 27.458,9.24 28.677,8.021 28.677,2.904 26.49,0.717 21.182,0.717 ; 2.565,17.594 2.565,6.798 8.646,0.717 9.482,0.717 ; 9.482,0.717 11.872,0.717 ; 10.193,24.963 10.193,28.836 ; 10.193,24.963 10.193,23.188 10.542,22.84 15.6,22.84 ; 10.193,28.836 10.193,32.213 ; 10.193,32.213 10.209,32.229 12.287,32.229 ; 11.872,0.717 21.182,0.717 ; 13.452,7.488 15.267,7.488 ; 15.267,7.488 17.325,7.488 20.618,10.781 20.618,11.522 ; 15.6,22.84 17.059,22.84 17.713,22.186 17.713,16.626 19.455,14.884 20.058,14.884 ; 20.058,14.884 22.431,14.884 ; 20.618,11.522 21.592,11.522 22.512,12.441 22.512,14.803 22.431,14.884
  Bottom Layer w0.508: v1(22.935,46.378) v1(22.935,50.51) ; v1(23.599,14.884) J4.4
-3.3V: C14.1 C19.1 C20.1 J5.20 U5.4 U6.8 U8.4 | length 38.9
  Top Layer w0.508: J5.20 1.346,36.449 3.783,38.887 ; C20.1 U8.4 3.783,38.887 ; v1(11.52,31.336) 11.52,31.242 v1(12.579,30.182) ; v1(11.52,33.08) 11.52,41.738 ; C14.1 11.794,27.767 12.474,27.767 ; v1(12.579,28.789) 12.579,27.873 12.474,27.767 ; C19.1 11.529,41.729 11.52,41.738 ; C19.1@13.012,41.738 U6.8 ; U5.4@13.183,27.767 12.474,27.767 ; 3.783,38.887 3.783,41.311 6.792,44.32 10,44.32 11.52,42.8 11.52,41.738
  Bottom Layer w0.508: v1(11.52,31.336) v1(11.52,33.08) ; v1(12.579,28.789) v1(12.579,30.182)
\R\E\S\E\T\: J3.10 J5.1 R7.2 U4.26 | length 25.3
  Top Layer w0.152: J5.1 1.346,9.226 1.654,8.919 v1(1.654,8.893) ; v1(6.249,8.893) 6.875,8.893 ; U4.26 7.752,10.907 6.875,10.03 6.875,8.893 ; R7.2 8.752,6.715 ; v1(12.272,7.037) 9.074,7.037 8.752,6.715 ; 6.875,8.893 6.875,7.756 7.915,6.715 8.752,6.715
  Bottom Layer w0.152: v1(1.654,8.893) v1(6.249,8.893) ; v1(12.272,7.037) 12.305,7.037 12.627,6.715 13.844,6.715 14.217,7.088 J3.10
AD5_IN: R1.1 U6.10 U6.11 | length 3.5
  Top Layer w0.152: R1.1 15.174,30.985 15.777,31.588 U6.10 U6.11
AD5_OUT: C18.1 U1.6 | length 2
  Top Layer w0.152: C18.1 20.938,27.864 21.51,27.291 U1.6
AGND: C1.1 C2.1 C3.2 C4.1 C5.2 C6.1 C7.1 C8.2 C9.2 C10.2 C11.1 C12.1 C13.1 C14.2 C15.1 C16.1 C17.1 C19.2 C20.2 J2.01 J3.3 J3.5 J3.9 J4.5 pad.2 R10.2 R11.2 R20.2 RJ1.2 U1.12 U1.13 U1.14 U2.6 U3.6 U4.10 U4.28 U4.33 U5.3 U7.2 U7.5 U8.3 U8.5 | length 51.3
  Top Layer w0.152: RJ1.2 v1@17.669,43.521
  Top Layer w0.254: C4.1@8.752,9.713 U4.28 ; U4.10 10.259,16.861 10.259,18.129 C7.1 ; U5.3 v1(13.874,28.789) ; v1@15.715,49.059 U2.6@16.394,48.381 ; v1(16.046,52.515) 16.048,52.512 16.957,52.512 U3.6 ; C8.2 22.81,17.055 ; v1(22.155,17.655) 22.157,17.658 22.157,19.282 U1.12 ; U1.13 22.81,17.658 ; v1(22.815,16.131) 22.81,16.137 22.81,17.055 ; U1.14 23.436,19.261 23.436,18.284 22.81,17.658 ; C3.2@23.654,46.317 23.796,46.317 24.155,45.959 24.155,45.653 v1(24.202,45.606) ; v1(23.715,49.747) C10.2 ; 22.81,17.055 22.81,17.658
  Top Layer w0.508: v1(4.446,23.301) 4.446,25.571 5.262,26.387 C17.1 ; U8.5 v1(4.623,31.878) 5.078,31.423 R20.2 ; 4.697,24.059 5.529,24.059 U7.2 ; v1(5.403,41.466) C20.2 5.423,40.48 5.847,40.056 5.847,38.933 U8.3 ; U7.5 9.267,24.013 v1(9.278,24.024) ; v1(8.433,30.086) C16.1 ; v1(8.752,19.597) C6.1 9.896,19.497 10.294,19.098 10.294,18.216 10.31,18.2 C7.1 ; C4.1 C4.1@8.792,9.693 ; C5.2 9.104,8.471 8.808,8.768 8.808,9.677 C4.1@8.792,9.693 ; C12.1@10.186,9.711 C12.1@10.17,9.695 ; R10.2 v1(11.211,24.785) ; C11.1 10.469,8.421 10.17,8.721 C12.1@10.17,9.695 ; v1(11.787,25.971) C14.2 ; C19.2 v1(12.881,43.224) ; v1(12.979,30.949) C15.1 ; C13.1 v1(17.399,23.726) 17.399,26.379 R11.2 ; C1.1 v1(16.957,16.229) C2.1 ; C8.2 21.148,16.24 21.382,16.006 21.382,15.956 C9.2 ; J2.01 v1(27.559,5.529) ; C4.1@8.792,9.693 v1(9.579,9.693) 10.168,9.693 C12.1@10.17,9.695
  other v1: 17.67,43.52 15.715,49.106
  other v2: 8.103,13.538 9.896,13.538 8.103,15.342 9.906,15.342
Electrode_1: J1.02 SB1.2 U2.9 | length 17
  Top Layer w0.152: J1.02 8.555,49.538 12.481,49.538 ; SB1.2 13.312,45.363 12.481,46.194 12.481,49.538 ; U2.9@16.896,46.929 15.615,46.929 15.12,47.423 15.12,49.146 14.728,49.538 12.481,49.538
Electrode_2: J1.03 SB2.2 U3.9 | length 13.3
  Top Layer w0.152: J1.03 8.693,50.67 8.693,49.949 8.783,49.86 12.836,49.86 v1(13.116,50.14) 15.22,50.14 16.091,51.01 U3.9 ; v1(13.116,48.958) 13.116,47.077 13.286,46.907 SB2.2
  Bottom Layer w0.152: v1@13.05,50.073 v1(13.116,50.14) v1(13.116,48.958)
Electrode_REF: J1.04 SB3.2 U3.3 | length 16.8
  Top Layer w0.152: J1.04 10.009,50.91 10.151,50.767 10.73,50.767 11.764,51.801 ; SB3.2 11.973,52.45 11.973,52.698 12.836,53.561 17.169,53.561 17.308,53.422 20.342,53.422 20.454,53.31 v1(21.832,53.31) ; U3.3 22.423,51.51 22.583,51.67 v1(22.677,51.67)
  Bottom Layer w0.152: v1(21.832,53.31) 22.677,52.465 v1(22.677,51.67)
EMG_1: SB1.1 U2.8 U6.2 | length 14.4
  Top Layer w0.152: SB1.1 14.746,44.945 15.59,44.1 18.236,44.1 19.897,44.1 21.888,44.1 22.127,43.862 U6.2 ; U2.8 17.04,47.284 17.781,47.284 18.28,46.786 18.28,44.189
EMG_2: SB2.1 U3.8 U6.1 | length 21.5
  Top Layer w0.152: SB2.1 16.456,44.753 v1(16.456,44.717) ; U3.8 17.033,51.436 17.875,51.436 18.009,51.303 18.009,49.301 18.559,48.751 18.559,44.928 18.867,44.621 20.078,44.621 v1(20.138,44.68) ; v1@20.138,44.62 20.201,44.683 22.159,44.683 23.183,43.659 23.183,41.952 U6.1
  Bottom Layer w0.152: v1(16.456,44.717) 16.505,44.669 20.126,44.669 v1(20.138,44.68)
EMG_ADC: U4.8 U7.1 U7.4 | length 15.9
  Top Layer w0.152: U7.1 5.58,24.959 6.525,24.959 6.875,24.609 6.875,23.513 7.325,23.063 U7.4 8.399,22.84 8.67,22.84 9.271,22.238 12.501,22.238 12.881,21.859 12.881,18.983 12.087,18.189 12.087,16.275 11.998,16.186 U4.8
EMG_REF: RJ1.1 SB3.1 U3.4 U6.5 | length 27.5
  Top Layer w0.152: v1(11.824,48.858) 11.824,45.4 12.904,44.32 13.586,44.32 14.385,43.521 16.309,43.521 ; v1(11.824,50.642) 11.89,50.575 12.447,50.575 12.989,51.117 12.989,51.57 SB3.1 12.989,52.45 12.989,52.789 13.343,53.143 20.227,53.143 20.316,53.053 20.316,52.1 20.405,52.01 U3.4 ; RJ1.1 16.309,43.521 ; U6.5@18.093,42.481 U6.5@18.317,42.257 ; U6.5@18.129,42.444 18.129,42.79 17.979,42.94 17.43,42.94 17.406,42.964 16.632,42.964 16.309,43.287 16.309,43.521 ; U6.5@18.317,42.257 U6.5 U6.5@18.317,42.257
  Bottom Layer w0.152: v1(11.824,48.858) v1(11.824,50.642)
HALF_3.3: U5.6 U5.7 U6.12 | length 17.4
  Top Layer w0.152: 12.382,29.386 11.705,29.386 11.02,28.702 11.02,25.779 11.486,25.312 12.248,25.312 12.906,25.971 13.535,25.971 13.728,25.779 13.728,25.312 U5.6 U5.7 ; 12.382,29.386 12.777,29.386 ; 12.777,29.386 17.465,29.386 18.317,30.238 U6.12
I2C_SCL: J2.04 R4.1 U1.16 U4.18 | length 50.7
  Top Layer w0.152: U4.18 5.458,15.686 3.491,13.72 3.491,6.984 7.678,2.797 v1(10.542,2.797) 16.605,2.797 20.008,6.2 23.063,6.2 23.195,6.069 23.209,6.069 23.749,5.529 J2.04 ; v1(22.969,9.138) 22.969,9.177 24.74,10.947 24.74,19.264 U1.16
  Bottom Layer w0.152: v1(10.507,1.499) 10.524,1.516 10.524,2.78 v1(10.542,2.797) ; v1(22.969,6.2) v1(22.969,9.138)
I2C_SDA: J2.05 R3.1 U1.15 U4.17 | length 51.5
  Top Layer w0.152: U4.17 5.455,16.186 3.126,13.857 3.126,6.951 7.87,2.207 12.881,2.207 ; R3.1 12.895,2.193 12.881,2.207 ; v1(21.158,9.144) 22.071,9.144 24.384,11.457 24.384,17.539 24.11,17.813 U1.15 ; J2.05 22.479,5.068 22.147,5.401 v1(21.17,5.401) 19.95,5.401 16.757,2.207 12.881,2.207
  Bottom Layer w0.152: v1(21.158,9.144) 21.164,9.138 21.164,5.406 v1(21.17,5.401)
IMP_1: U2.2 U2.10 | length 6.3
  Top Layer w0.152: U2.10 16.967,45.767 17.348,45.386 v1(17.348,45.364) ; v1(19.191,45.379) 19.945,45.379 20.317,45.751 20.317,46.695 20.406,46.784 21.293,46.784 U2.2
  Bottom Layer w0.152: v1(17.348,45.364) 17.356,45.372 19.184,45.372 v1(19.191,45.379)
IMP_2: U2.4 U3.10 | length 6.4
  Top Layer w0.152: U3.10 16.959,50.06 v1(17.429,49.59) ; v1(19.167,49.59) 20.067,49.59 20.387,49.269 20.387,48.092 20.551,47.929 U2.4@21.296,47.929
  Bottom Layer w0.152: v1(17.429,49.59) v1(19.167,49.59)
IMP_ELEC: R9.2 R12.1 U2.3 U5.2 U6.15 | length 35.6
  Top Layer w0.152: R9.2 16.456,27.584 15.834,26.962 14.613,26.962 14.524,27.052 U5.2 14.669,27.912 14.669,28.379 14.992,28.702 17.43,28.702 19.191,30.463 R12.1 22.232,32.133 U6.15 22.127,32.837 22.766,33.477 24.771,33.477 25.451,34.156 25.451,45.693 23.786,47.358 U2.3
IMP_REF: R12.2 U3.2 U5.1 U6.16 | length 35.5
  Top Layer w0.152: U5.1 15.174,28.04 15.322,28.189 17.613,28.189 19.333,29.909 22.792,29.909 22.986,30.102 22.986,30.317 R12.2 23.132,31.324 23.397,31.588 U6.16 24.934,32.238 25.806,33.111 25.806,45.849 24.63,47.025 24.63,50.546 24.086,51.09 22.695,51.09 22.565,51.09 22.485,51.01 U3.2
LED0: LED1.1 U4.14 | length 2
  Top Layer w0.152: LED1.1 7.871,18.2 8.267,17.803 8.267,16.869 U4.14
LED1: J5.4 U4.16 | length 6.7
  Top Layer w0.152: v1(3.519,15.284) 5.089,16.853 U4.16
  Bottom Layer w0.152: J5.4 3.119,14.884 v1(3.519,15.284)
LED2: J5.5 U4.15 | length 7.6
  Top Layer w0.152: v1(3.474,16.525) 4.499,17.551 7.633,17.551 7.752,17.432 U4.15
  Bottom Layer w0.152: J5.5 1.378,16.186 1.394,16.17 3.044,16.17 3.399,16.525 v1(3.474,16.525)
MST_I2C_SCL: J5.9 U4.12 | length 10.1
  Top Layer w0.152: J5.9 2.804,21.234 v1(3.491,20.547) ; v1(4.616,19.423) 7.347,19.423 9.252,17.518 U4.12
  Bottom Layer w0.152: v1(3.491,20.547) v1(4.616,19.423)
MST_I2C_SDA: J5.10 U4.11 | length 11.1
  Top Layer w0.152: J5.10 3.139,22.504 v1(4.238,21.406) ; v1(5.469,20.161) 7.111,20.161 9.752,17.521 U4.11
  Bottom Layer w0.152: v1(4.238,21.406) 4.238,21.399 5.469,20.168 v1(5.469,20.161)
NetC4_2: C4.2 C5.1 U4.27 | length 3.7
  Top Layer w0.254: C4.2 7.992,10.572 8.252,10.832 U4.27
  Top Layer w0.508: C5.1 7.9,8.667 C4.2@7.9,9.622
NetC6_2: C6.2 C7.2 L1.2 U4.9 | length 4.5
  Top Layer w0.254: U4.9 10.752,17.594 10.95,17.793 C7.2@10.95,18.057
  Top Layer w0.508: C7.2 11.13,18.2 11.25,18.319 11.25,19.251 C6.2 L1.2@11.596,21.251
NetC18_2: C18.2 R9.1 R11.1 | length 3
  Top Layer w0.152: R11.1 R9.1@18.407,27.577 ; R9.1 19.084,27.584 19.363,27.864 C18.2
NetC21_1: C21.1 C22.2 R13.1 U8.2 | length 5
  Top Layer w0.152: U8.2 7.163,40.369 R13.1 7.389,40.595 C21.1 7.389,42.253 8.005,42.87 C22.2
NetC21_2: C21.2 R13.2 R19.1 U8.1 | length 5.6
  Top Layer w0.152: C21.2 8.373,41.558 R13.2 8.433,40.42 U8.1 8.433,38.513 8.657,38.289 9.083,38.289 9.881,37.491 R19.1
NetC22_1: C22.1 R18.2 | length 1.2
  Top Layer w0.152: R18.2@9.5,41.63 C22.1
NetC23_1: C23.1 R14.2 U8.7 | length 2.7
  Top Layer w0.152: C23.1 R14.2 6.978,31.903 7.163,32.088 U8.7
NetC23_2: C23.2 R16.2 R20.1 U7.3 | length 13.1
  Top Layer w0.152: U7.3@5.574,23.062 U7.3 5.325,23.063 4.75,22.488 4.238,22.488 3.765,22.961 3.765,26.387 5.192,27.814 6.351,27.814 6.978,28.441 6.978,28.836 ; R20.1 6.978,28.836 ; C23.2 6.978,28.836 ; R16.2 6.978,28.836
NetLED1_2: LED1.2 R6.2 | length 1.1
  Top Layer w0.152: R6.2 5.399,18.193 6.509,18.193 LED1.2
NetR1_2: R1.2 R2.1 U1.5 | length 8.8
  Top Layer w0.152: R1.2 v1(17.358,30.263) ; v1(18.952,28.702) 21.312,28.702 21.976,28.038 22.009,28.038 22.16,27.886 U1.5
  Bottom Layer w0.152: v1(17.358,30.263) 17.374,30.263 18.935,28.702 v1(18.952,28.702)
NetR2_2: R2.2 U1.4 | length 1.9
  Top Layer w0.152: U1.4 22.81,27.467 23.194,27.851 R2.2
NetR8_2: R8.2 R10.1 U5.5 | length 2.6
  Top Layer w0.152: R10.1@12.233,23.726 R8.2 13.224,23.876 U5.5
NetR14_1: R14.1 R19.2 U8.6 | length 7.1
  Top Layer w0.152: R14.1 6.078,31.903 5.893,32.088 U8.6 6.047,33.591 6.047,34.296 6.567,34.817 8.756,34.817 R19.2
NetR15_1: R15.1 U6.4 | length 2.2
  Top Layer w0.152: R15.1 18.83,43.36 18.83,43.035 19.253,42.612 19.363,42.612 19.363,41.962 U6.4
NetR15_2: R15.2 R17.1 | length 0.9
  Top Layer w0.152: R15.2 R17.1
NetR17_2: R17.2 U6.3 | length 2
  Top Layer w0.152: U6.3 20.857,42.828 21.503,43.474 R17.2
NetR18_1: R18.1 U6.6 U6.7 | length 9.5
  Top Layer w0.152: R18.1 10.587,41.702 v1(10.587,42.363) ; v1(11.852,43.61) 12.191,43.949 13.488,43.949 14.213,43.224 15.466,43.224 15.777,42.913 U6.7 U6.6
  Bottom Layer w0.152: v1(10.587,42.363) 10.596,42.363 11.843,43.61 v1(11.852,43.61)
SW_1: U2.7 U4.21 | length 98.4
  Top Layer w0.152: U4.21 5.466,14.186 4.578,13.297 4.578,7.323 7.752,4.148 16.201,4.148 19.439,7.386 24.405,7.386 26.162,9.143 26.162,17.539 27.352,18.728 27.352,44.556 27.352,49.409 22.032,54.729 14.583,54.729 14.049,54.195 v1(14.049,54.149) ; v1(14.049,50.767) 14.052,50.77 14.052,52.378 v1(14.054,52.381) ; v1@15.75,47.893 U2.7@16.931,47.893
  Bottom Layer w0.152: v1(14.049,50.767) 14.049,48.83 14.951,47.929 v1(15.715,47.929) ; v1(14.049,54.149) 14.052,54.146 14.052,52.383 v1(14.054,52.381)
SW_2: U3.7 U4.22 | length 91
  Top Layer w0.152: U4.22 5.469,13.686 4.91,13.127 4.91,7.519 7.925,4.504 16.054,4.504 19.306,7.756 24.25,7.756 25.806,9.312 25.806,17.686 26.996,18.876 26.996,49.37 22.225,54.141 v1(15.539,54.141) ; v1(15.466,51.331) 15.539,51.331 16.145,51.936 16.885,51.936 U3.7
  Bottom Layer w0.152: v1(15.466,51.331) 14.805,51.992 14.805,53.834 15.061,54.09 15.488,54.09 v1(15.539,54.141)
SW_IMP: U2.5 U4.24 | length 71.9
  Top Layer w0.152: U4.24 5.916,12.686 5.469,12.239 5.469,7.962 8.216,5.215 15.759,5.215 19.015,8.471 23.928,8.471 25.095,9.638 25.095,17.981 26.285,19.17 26.285,47.645 v1(25.572,48.358) ; U2.5 v1(23.705,48.36)
  Bottom Layer w0.152: v1@23.705,48.359 v1@25.571,48.359
SW_REF: U3.5 U4.23 | length 76.8
  Top Layer w0.152: U4.23 5.559,13.186 5.19,12.817 5.19,7.775 8.105,4.86 15.907,4.86 19.163,8.116 24.107,8.116 25.451,9.459 25.451,17.833 26.641,19.023 26.641,49.043 23.173,52.51 U3.5
SWCLK: J3.4 R5.2 U4.31 | length 12.2
  Top Layer w0.152: U4.31 10.252,11.358 10.469,11.14 12.209,11.14 14.095,9.255 16.328,9.255 ; R5.2 16.328,8.54 16.328,9.255 ; v1(18.019,9.255) 16.328,9.255
  Bottom Layer w0.152: v1(18.019,9.255) 18.023,9.258 18.023,11.347 J3.4
SWDIO: J3.2 U4.32 | length 10.3
  Top Layer w0.152: U4.32 11.985,12.018 13.793,10.21 19.119,10.21 19.297,10.388 J3.2
TEMP_CONV: J2.02 U4.20 | length 35.9
  Top Layer w0.152: U4.20 5.463,14.686 4.222,13.444 4.222,7.102 7.531,3.793 16.594,3.793 19.861,7.06 24.708,7.06 26.289,5.479 J2.02
TEMP_INT: J2.03 U4.19 | length 36.1
  Top Layer w0.152: U4.19 5.461,15.186 3.847,13.572 3.847,7.023 7.433,3.437 16.741,3.437 20.085,6.781 24.212,6.781 25.019,5.974 J2.03
XIN32: C1.2 U4.1 Y1.2 | length 5.9
  Top Layer w0.152: U4.1 11.463,12.729 12.153,12.729 13.184,13.76 13.184,14.43 13.658,14.904 Y1.2 16.016,14.904 C1.2
XOUT32: C2.2 U4.2 Y1.1 | length 8.1
  Top Layer w0.152: U4.2 11.436,13.202 11.832,13.202 12.639,14.01 12.639,17.006 12.989,17.356 13.992,17.356 Y1.1 C2.2
pads on no net: J1.01 J3.6 J3.7 J3.8 J4.1 J4.2 J4.3 J4.6 J4.7 J4.8 J4.9 J4.10 J4.11 J4.12 J4.13 J4.14 J4.15 J4.16 J4.17 J4.18 J4.19 J4.20 J5.2 J5.3 J5.6 J5.7 J5.8 J5.11 J5.12 J5.13 J5.14 J5.15 J5.16 J5.17 J5.18 J5.19 U1.1 U1.2 U1.3 U1.7 U1.8 U4.3 U4.4 U4.5 U4.6 U4.7 U4.13 U4.25 U4.29 U6.13 U6.14

## Polygon pours and split planes (outlines as drawn)
AGND on Bottom Layer "AGND_L02_P000" (solid, pour order 0): 2.762,55.02 27.23,55.02 29.997,52.252 29.997,2.905 27.093,0 2.762,0 0,2.762 0,52.258

## Silkscreen, mask and mechanical layers (free items; w line width, h text height)
Board:
  lines w0.254: 2.762,55.017 27.235,55.015 cw(c27.235,52.252) 29.997,52.252 ; 2.762,55.02 ccw(c2.762,52.258) 0,52.258 0,2.762 ccw(c2.762,2.762) 2.762,0 27.235,0 ccw(c27.235,2.762) 29.997,2.762